# Altium PCB PCB1.PcbDoc (part 2 of 2)
Units mm, origin at the board's own origin, x right, y up, seen from the top; angles counter-clockwise.
Board outline 102 x 101.22 mm, 2 copper layers (Top Layer, Bottom Layer); 182 components, 6 nets, 441 pads, 0 vias.
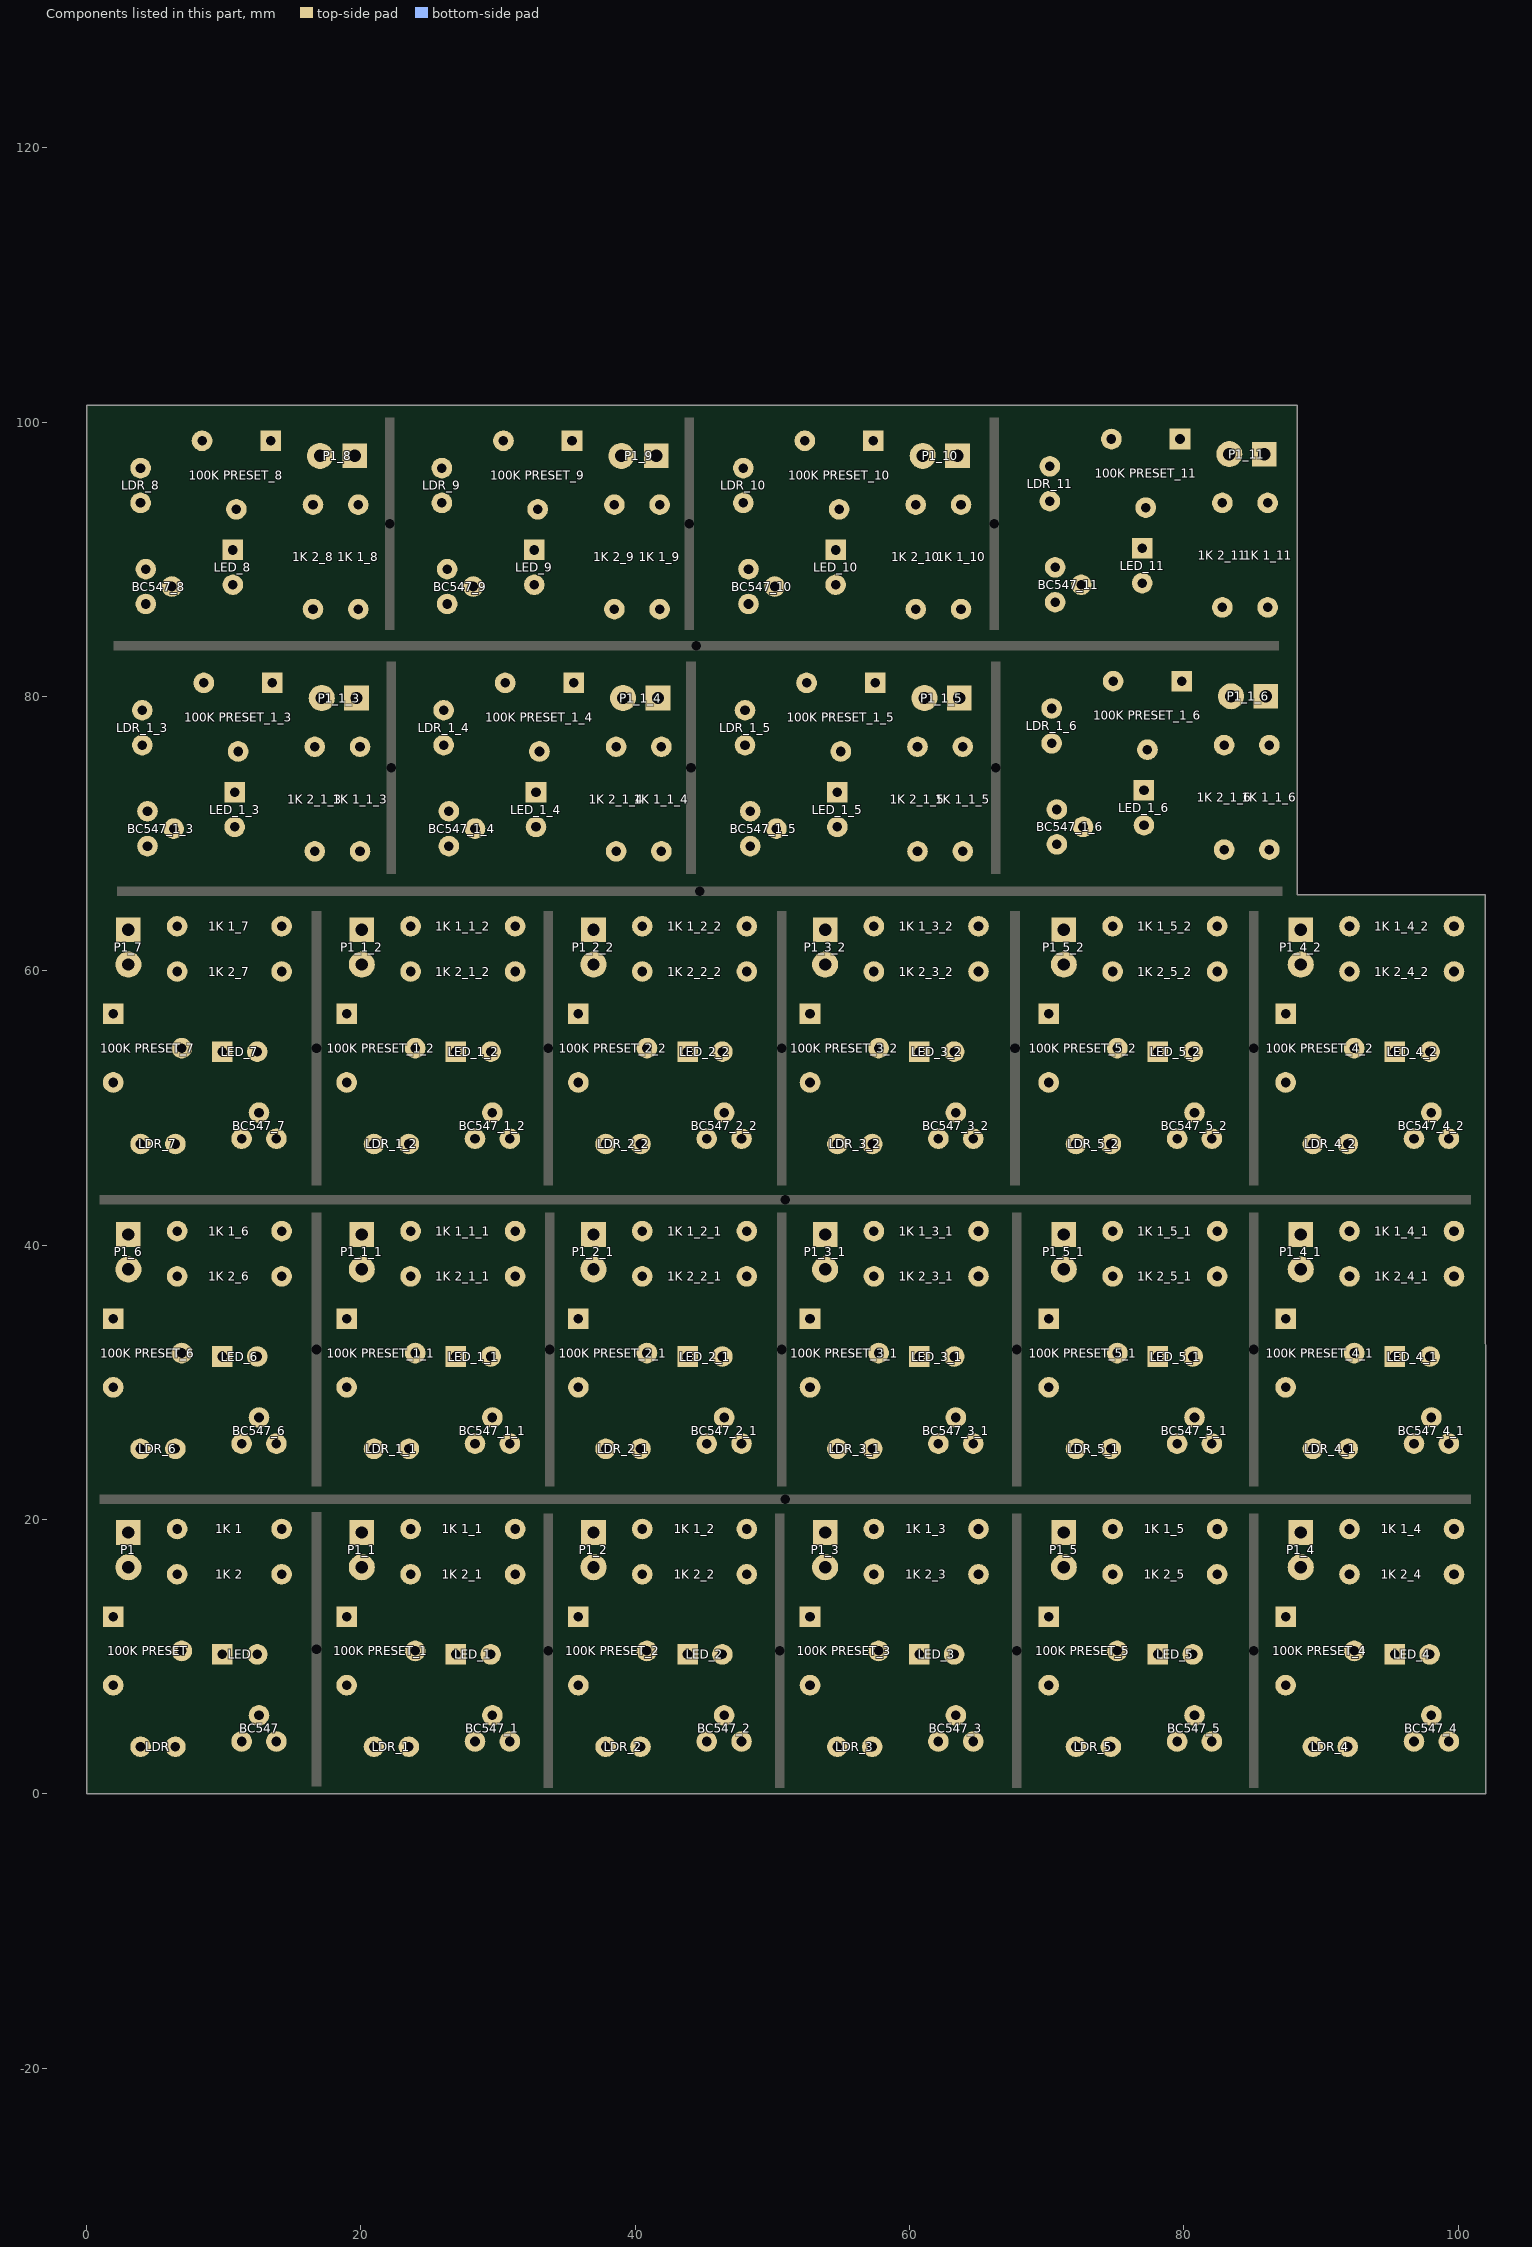
[diagram p2: the components of this part, seen from the top]

## Nets (pads, with @x,y where several pads share a name; then routed paths per layer and width w, separated by ;. In a path a pad name is that pad's centre, name@x,y a point inside that pad or via, vN(x,y) a via of type N, cw(c..) or ccw(c..) an arc to the next point about the centre after c; other vN are vias at no path point) (continued)
copper on no net: | length 1969
  Top Layer w0.508: 3.048,38.227 4.572,36.703 4.572,27.051 6.477,25.146 ; 3.048,60.452 4.572,58.928 4.572,49.276 6.477,47.371 ; 3.937,94.107 5.842,96.012 15.494,96.012 17.018,97.536 ; 4.064,76.454 5.969,78.359 15.621,78.359 17.145,79.883 ; 6.223,88.011 7.747,89.535 7.747,90.464 10.922,93.639 ; 6.35,70.358 7.874,71.882 7.874,72.811 11.049,75.986 ; 6.945,32.131 10.12,28.956 11.049,28.956 12.573,27.432 ; 6.945,54.356 10.12,51.181 11.049,51.181 12.573,49.657 ; 20.066,16.51 21.59,14.986 21.59,5.334 23.495,3.429 ; 20.066,38.227 21.59,36.703 21.59,27.051 23.495,25.146 ; 20.066,60.452 21.59,58.928 21.59,49.276 23.495,47.371 ; 23.963,10.414 27.138,7.239 28.067,7.239 29.591,5.715 ; 23.963,32.131 27.138,28.956 28.067,28.956 29.591,27.432 ; 23.963,54.356 27.138,51.181 28.067,51.181 29.591,49.657 ; 25.908,94.107 27.813,96.012 37.465,96.012 38.989,97.536 ; 26.035,76.454 27.94,78.359 37.592,78.359 39.116,79.883 ; 28.194,88.011 29.718,89.535 29.718,90.464 32.893,93.639 ; 28.321,70.358 29.845,71.882 29.845,72.811 33.02,75.986 ; 36.957,16.51 38.481,14.986 38.481,5.334 40.386,3.429 ; 36.957,38.227 38.481,36.703 38.481,27.051 40.386,25.146 ; 36.957,60.452 38.481,58.928 38.481,49.276 40.386,47.371 ; 40.854,10.414 44.029,7.239 44.958,7.239 46.482,5.715 ; 40.854,32.131 44.029,28.956 44.958,28.956 46.482,27.432 ; 40.854,54.356 44.029,51.181 44.958,51.181 46.482,49.657 ; 47.879,94.107 49.784,96.012 59.436,96.012 60.96,97.536 ; 48.006,76.454 49.911,78.359 59.563,78.359 61.087,79.883 ; 50.165,88.011 51.689,89.535 51.689,90.464 54.864,93.639 ; 50.292,70.358 51.816,71.882 51.816,72.811 54.991,75.986 ; 53.848,16.51 55.372,14.986 55.372,5.334 57.277,3.429 ; 53.848,38.227 55.372,36.703 55.372,27.051 57.277,25.146 ; 53.848,60.452 55.372,58.928 55.372,49.276 57.277,47.371 ; 57.745,10.414 60.92,7.239 61.849,7.239 63.373,5.715 ; 57.745,32.131 60.92,28.956 61.849,28.956 63.373,27.432 ; 57.745,54.356 60.92,51.181 61.849,51.181 63.373,49.657 ; 70.231,94.234 72.136,96.139 81.788,96.139 83.312,97.663 ; 70.358,76.581 72.263,78.486 81.915,78.486 83.439,80.01 ; 71.247,16.51 72.771,14.986 72.771,5.334 74.676,3.429 ; 71.247,38.227 72.771,36.703 72.771,27.051 74.676,25.146 ; 71.247,60.452 72.771,58.928 72.771,49.276 74.676,47.371 ; 72.517,88.138 74.041,89.662 74.041,90.591 77.216,93.766 ; 72.644,70.485 74.168,72.009 74.168,72.938 77.343,76.113 ; 75.144,10.414 78.319,7.239 79.248,7.239 80.772,5.715 ; 75.144,32.131 78.319,28.956 79.248,28.956 80.772,27.432 ; 75.144,54.356 78.319,51.181 79.248,51.181 80.772,49.657 ; 88.519,16.51 90.043,14.986 90.043,5.334 91.948,3.429 ; 88.519,38.227 90.043,36.703 90.043,27.051 91.948,25.146 ; 88.519,60.452 90.043,58.928 90.043,49.276 91.948,47.371 ; 92.416,10.414 95.591,7.239 96.52,7.239 98.044,5.715 ; 92.416,32.131 95.591,28.956 96.52,28.956 98.044,27.432 ; 92.416,54.356 95.591,51.181 96.52,51.181 98.044,49.657
  Bottom Layer w0.508: 1.945,34.631 7.834,34.631 14.224,41.021 ; 1.945,56.856 7.834,56.856 14.224,63.246 ; 3.048,40.767 6.35,40.767 6.604,41.021 6.604,37.719 ; 3.048,62.992 6.35,62.992 6.604,63.246 6.604,59.944 ; 3.937,25.146 1.945,27.138 1.945,29.631 4.445,29.631 6.945,32.131 ; 3.937,47.371 1.945,49.363 1.945,51.856 4.445,51.856 6.945,54.356 ; 3.937,94.107 2.794,92.964 2.794,88.265 4.318,86.741 ; 3.937,96.647 5.929,98.639 8.422,98.639 8.422,96.139 10.922,93.639 ; 4.064,76.454 2.921,75.311 2.921,70.612 4.445,69.088 ; 4.064,78.994 6.056,80.986 8.549,80.986 8.549,78.486 11.049,75.986 ; 4.318,89.281 4.953,89.916 8.89,89.916 10.668,88.138 ; 4.445,71.628 5.08,72.263 9.017,72.263 10.795,70.485 ; 6.477,25.146 7.62,24.003 12.319,24.003 13.843,25.527 ; 6.477,47.371 7.62,46.228 12.319,46.228 13.843,47.752 ; 9.906,31.877 9.906,33.401 14.224,37.719 ; 9.906,54.102 9.906,55.626 14.224,59.944 ; 10.668,90.678 12.192,90.678 16.51,86.36 ; 10.795,73.025 12.319,73.025 16.637,68.707 ; 11.303,25.527 10.668,26.162 10.668,30.099 12.446,31.877 ; 11.303,47.752 10.668,48.387 10.668,52.324 12.446,54.102 ; 13.422,98.639 13.422,92.75 19.812,86.36 ; 13.549,80.986 13.549,75.097 19.939,68.707 ; 16.51,93.98 19.812,93.98 19.558,94.234 19.558,97.536 ; 16.637,76.327 19.939,76.327 19.685,76.581 19.685,79.883 ; 18.963,12.914 24.852,12.914 31.242,19.304 ; 18.963,34.631 24.852,34.631 31.242,41.021 ; 18.963,56.856 24.852,56.856 31.242,63.246 ; 20.066,19.05 23.368,19.05 23.622,19.304 23.622,16.002 ; 20.066,40.767 23.368,40.767 23.622,41.021 23.622,37.719 ; 20.066,62.992 23.368,62.992 23.622,63.246 23.622,59.944 ; 20.955,3.429 18.963,5.421 18.963,7.914 21.463,7.914 23.963,10.414 ; 20.955,25.146 18.963,27.138 18.963,29.631 21.463,29.631 23.963,32.131 ; 20.955,47.371 18.963,49.363 18.963,51.856 21.463,51.856 23.963,54.356 ; 23.495,3.429 24.638,2.286 29.337,2.286 30.861,3.81 ; 23.495,25.146 24.638,24.003 29.337,24.003 30.861,25.527 ; 23.495,47.371 24.638,46.228 29.337,46.228 30.861,47.752 ; 25.908,94.107 24.765,92.964 24.765,88.265 26.289,86.741 ; 25.908,96.647 27.9,98.639 30.393,98.639 30.393,96.139 32.893,93.639 ; 26.035,76.454 24.892,75.311 24.892,70.612 26.416,69.088 ; 26.035,78.994 28.027,80.986 30.52,80.986 30.52,78.486 33.02,75.986 ; 26.289,89.281 26.924,89.916 30.861,89.916 32.639,88.138 ; 26.416,71.628 27.051,72.263 30.988,72.263 32.766,70.485 ; 26.924,10.16 26.924,11.684 31.242,16.002 ; 26.924,31.877 26.924,33.401 31.242,37.719 ; 26.924,54.102 26.924,55.626 31.242,59.944 ; 28.321,3.81 27.686,4.445 27.686,8.382 29.464,10.16 ; 28.321,25.527 27.686,26.162 27.686,30.099 29.464,31.877 ; 28.321,47.752 27.686,48.387 27.686,52.324 29.464,54.102 ; 32.639,90.678 34.163,90.678 38.481,86.36 ; 32.766,73.025 34.29,73.025 38.608,68.707 ; 35.393,98.639 35.393,92.75 41.783,86.36 ; 35.52,80.986 35.52,75.097 41.91,68.707 ; 35.854,12.914 41.743,12.914 48.133,19.304 ; 35.854,34.631 41.743,34.631 48.133,41.021 ; 35.854,56.856 41.743,56.856 48.133,63.246 ; 36.957,19.05 40.259,19.05 40.513,19.304 40.513,16.002 ; 36.957,40.767 40.259,40.767 40.513,41.021 40.513,37.719 ; 36.957,62.992 40.259,62.992 40.513,63.246 40.513,59.944 ; 37.846,3.429 35.854,5.421 35.854,7.914 38.354,7.914 40.854,10.414 ; 37.846,25.146 35.854,27.138 35.854,29.631 38.354,29.631 40.854,32.131 ; 37.846,47.371 35.854,49.363 35.854,51.856 38.354,51.856 40.854,54.356 ; 38.481,93.98 41.783,93.98 41.529,94.234 41.529,97.536 ; 38.608,76.327 41.91,76.327 41.656,76.581 41.656,79.883 ; 40.386,3.429 41.529,2.286 46.228,2.286 47.752,3.81 ; 40.386,25.146 41.529,24.003 46.228,24.003 47.752,25.527 ; 40.386,47.371 41.529,46.228 46.228,46.228 47.752,47.752 ; 43.815,10.16 43.815,11.684 48.133,16.002 ; 43.815,31.877 43.815,33.401 48.133,37.719 ; 43.815,54.102 43.815,55.626 48.133,59.944 ; 45.212,3.81 44.577,4.445 44.577,8.382 46.355,10.16 ; 45.212,25.527 44.577,26.162 44.577,30.099 46.355,31.877 ; 45.212,47.752 44.577,48.387 44.577,52.324 46.355,54.102 ; 47.879,94.107 46.736,92.964 46.736,88.265 48.26,86.741 ; 47.879,96.647 49.871,98.639 52.364,98.639 52.364,96.139 54.864,93.639 ; 48.006,76.454 46.863,75.311 46.863,70.612 48.387,69.088 ; 48.006,78.994 49.998,80.986 52.491,80.986 52.491,78.486 54.991,75.986 ; 48.26,89.281 48.895,89.916 52.832,89.916 54.61,88.138 ; 48.387,71.628 49.022,72.263 52.959,72.263 54.737,70.485 ; 52.745,12.914 58.634,12.914 65.024,19.304 ; 52.745,34.631 58.634,34.631 65.024,41.021 ; 52.745,56.856 58.634,56.856 65.024,63.246 ; 53.848,19.05 57.15,19.05 57.404,19.304 57.404,16.002 ; 53.848,40.767 57.15,40.767 57.404,41.021 57.404,37.719 ; 53.848,62.992 57.15,62.992 57.404,63.246 57.404,59.944 ; 54.61,90.678 56.134,90.678 60.452,86.36 ; 54.737,3.429 52.745,5.421 52.745,7.914 55.245,7.914 57.745,10.414 ; 54.737,25.146 52.745,27.138 52.745,29.631 55.245,29.631 57.745,32.131 ; 54.737,47.371 52.745,49.363 52.745,51.856 55.245,51.856 57.745,54.356 ; 54.737,73.025 56.261,73.025 60.579,68.707 ; 57.277,3.429 58.42,2.286 63.119,2.286 64.643,3.81 ; 57.277,25.146 58.42,24.003 63.119,24.003 64.643,25.527 ; 57.277,47.371 58.42,46.228 63.119,46.228 64.643,47.752 ; 57.364,98.639 57.364,92.75 63.754,86.36 ; 57.491,80.986 57.491,75.097 63.881,68.707 ; 60.452,93.98 63.754,93.98 63.5,94.234 63.5,97.536 ; 60.579,76.327 63.881,76.327 63.627,76.581 63.627,79.883 ; 60.706,10.16 60.706,11.684 65.024,16.002 ; 60.706,31.877 60.706,33.401 65.024,37.719 ; 60.706,54.102 60.706,55.626 65.024,59.944 ; 62.103,3.81 61.468,4.445 61.468,8.382 63.246,10.16 ; 62.103,25.527 61.468,26.162 61.468,30.099 63.246,31.877 ; 62.103,47.752 61.468,48.387 61.468,52.324 63.246,54.102 ; 70.144,12.914 76.033,12.914 82.423,19.304 ; 70.144,34.631 76.033,34.631 82.423,41.021 ; 70.144,56.856 76.033,56.856 82.423,63.246 ; 70.231,94.234 69.088,93.091 69.088,88.392 70.612,86.868 ; 70.231,96.774 72.223,98.766 74.716,98.766 74.716,96.266 77.216,93.766 ; 70.358,76.581 69.215,75.438 69.215,70.739 70.739,69.215 ; 70.358,79.121 72.35,81.113 74.843,81.113 74.843,78.613 77.343,76.113 ; 70.612,89.408 71.247,90.043 75.184,90.043 76.962,88.265 ; 70.739,71.755 71.374,72.39 75.311,72.39 77.089,70.612 ; 71.247,19.05 74.549,19.05 74.803,19.304 74.803,16.002 ; 71.247,40.767 74.549,40.767 74.803,41.021 74.803,37.719 ; 71.247,62.992 74.549,62.992 74.803,63.246 74.803,59.944 ; 72.136,3.429 70.144,5.421 70.144,7.914 72.644,7.914 75.144,10.414 ; 72.136,25.146 70.144,27.138 70.144,29.631 72.644,29.631 75.144,32.131 ; 72.136,47.371 70.144,49.363 70.144,51.856 72.644,51.856 75.144,54.356 ; 74.676,3.429 75.819,2.286 80.518,2.286 82.042,3.81 ; 74.676,25.146 75.819,24.003 80.518,24.003 82.042,25.527 ; 74.676,47.371 75.819,46.228 80.518,46.228 82.042,47.752 ; 76.962,90.805 78.486,90.805 82.804,86.487 ; 77.089,73.152 78.613,73.152 82.931,68.834 ; 78.105,10.16 78.105,11.684 82.423,16.002 ; 78.105,31.877 78.105,33.401 82.423,37.719 ; 78.105,54.102 78.105,55.626 82.423,59.944 ; 79.502,3.81 78.867,4.445 78.867,8.382 80.645,10.16 ; 79.502,25.527 78.867,26.162 78.867,30.099 80.645,31.877 ; 79.502,47.752 78.867,48.387 78.867,52.324 80.645,54.102 ; 79.716,98.766 79.716,92.877 86.106,86.487 ; 79.843,81.113 79.843,75.224 86.233,68.834 ; 82.804,94.107 86.106,94.107 85.852,94.361 85.852,97.663 ; 82.931,76.454 86.233,76.454 85.979,76.708 85.979,80.01 ; 87.416,12.914 93.305,12.914 99.695,19.304 ; 87.416,34.631 93.305,34.631 99.695,41.021 ; 87.416,56.856 93.305,56.856 99.695,63.246 ; 88.519,19.05 91.821,19.05 92.075,19.304 92.075,16.002 ; 88.519,40.767 91.821,40.767 92.075,41.021 92.075,37.719 ; 88.519,62.992 91.821,62.992 92.075,63.246 92.075,59.944 ; 89.408,3.429 87.416,5.421 87.416,7.914 89.916,7.914 92.416,10.414 ; 89.408,25.146 87.416,27.138 87.416,29.631 89.916,29.631 92.416,32.131 ; 89.408,47.371 87.416,49.363 87.416,51.856 89.916,51.856 92.416,54.356 ; 91.948,3.429 93.091,2.286 97.79,2.286 99.314,3.81 ; 91.948,25.146 93.091,24.003 97.79,24.003 99.314,25.527 ; 91.948,47.371 93.091,46.228 97.79,46.228 99.314,47.752 ; 95.377,10.16 95.377,11.684 99.695,16.002 ; 95.377,31.877 95.377,33.401 99.695,37.719 ; 95.377,54.102 95.377,55.626 99.695,59.944 ; 96.774,3.81 96.139,4.445 96.139,8.382 97.917,10.16 ; 96.774,25.527 96.139,26.162 96.139,30.099 97.917,31.877 ; 96.774,47.752 96.139,48.387 96.139,52.324 97.917,54.102

## Keep-outs
Keep-Out Layer:
  lines w0.254: 102.108,-0.254 101.746,-0.254 -0.127,-0.254 -0.127,101.346 88.519,101.346 88.519,65.913 101.6,65.913 102.108,65.913

## Silkscreen, mask and mechanical layers (free items; w line width, h text height)
Top Overlay:
  drawing of 416 lines, arcs and shapes, not listed
  text "-" at 82.55,100.076 h1.3 r270
  text "+" at 85.09,100.076 h1.52 r270
  text "-" at 16.256,99.949 h1.3 r270
  text "+" at 18.796,99.949 h1.52 r270
  text "-" at 38.227,99.949 h1.3 r270
  text "+" at 40.767,99.949 h1.52 r270
  text "-" at 60.198,99.949 h1.3 r270
  text "+" at 62.738,99.949 h1.52 r270
  text "PRESET" at 75.819,99.314 h0.8 r270
  text "PRESET" at 9.525,99.187 h0.8 r270
  text "PRESET" at 31.496,99.187 h0.8 r270
  text "PRESET" at 53.467,99.187 h0.8 r270
  text "100K" at 77.47,99.06 h1.2 r270
  text "100K" at 11.176,98.933 h1.2 r270
  text "100K" at 33.147,98.933 h1.2 r270
  text "100K" at 55.118,98.933 h1.2 r270
  text "LDR" at 68.199,98.552 h1.3
  text "LDR" at 1.905,98.425 h1.3
  text "LDR" at 23.876,98.425 h1.3
  text "LDR" at 45.847,98.425 h1.3
  text "9V" at 85.471,96.012 h1.2 r180
  text "9V" at 19.177,95.885 h1.2 r180
  text "9V" at 41.148,95.885 h1.2 r180
  text "9V" at 63.119,95.885 h1.2 r180
  text "LED" at 79.883,91.694 h1.3 r270
  text "LED" at 13.589,91.567 h1.3 r270
  text "LED" at 35.56,91.567 h1.3 r270
  text "LED" at 57.531,91.567 h1.3 r270
  text "+" at 77.724,91.186 h1.52 r270
  text "1K" at 82.296,91.186 h1 r270
  text "1K" at 85.598,91.186 h1 r270
  text "+" at 11.43,91.059 h1.52 r270
  text "1K" at 16.002,91.059 h1 r270
  text "1K" at 19.304,91.059 h1 r270
  text "+" at 33.401,91.059 h1.52 r270
  text "1K" at 37.973,91.059 h1 r270
  text "1K" at 41.275,91.059 h1 r270
  text "+" at 55.372,91.059 h1.52 r270
  text "1K" at 59.944,91.059 h1 r270
  text "1K" at 63.246,91.059 h1 r270
  text "BC547" at 67.564,90.551 h1.1 r270
  text "BC547" at 1.27,90.424 h1.1 r270
  text "BC547" at 23.241,90.424 h1.1 r270
  text "BC547" at 45.212,90.424 h1.1 r270
  text "-" at 77.47,88.646 h1.3 r270
  text "-" at 11.176,88.519 h1.3 r270
  text "-" at 33.147,88.519 h1.3 r270
  text "-" at 55.118,88.519 h1.3 r270
  text "A.I. PCB" at 72.136,85.09 h0.9
  text "A.I. PCB" at 5.842,84.963 h0.9
  text "A.I. PCB" at 27.813,84.963 h0.9
  text "A.I. PCB" at 49.784,84.963 h0.9
  text "-" at 82.677,82.423 h1.3 r270
  text "+" at 85.217,82.423 h1.52 r270
  text "-" at 16.383,82.296 h1.3 r270
  text "+" at 18.923,82.296 h1.52 r270
  text "-" at 38.354,82.296 h1.3 r270
  text "+" at 40.894,82.296 h1.52 r270
  text "-" at 60.325,82.296 h1.3 r270
  text "+" at 62.865,82.296 h1.52 r270
  text "PRESET" at 75.946,81.661 h0.8 r270
  text "PRESET" at 9.652,81.534 h0.8 r270
  text "PRESET" at 31.623,81.534 h0.8 r270
  text "PRESET" at 53.594,81.534 h0.8 r270
  text "100K" at 77.597,81.407 h1.2 r270
  text "100K" at 11.303,81.28 h1.2 r270
  text "100K" at 33.274,81.28 h1.2 r270
  text "100K" at 55.245,81.28 h1.2 r270
  text "LDR" at 68.326,80.899 h1.3
  text "LDR" at 2.032,80.772 h1.3
  text "LDR" at 24.003,80.772 h1.3
  text "LDR" at 45.974,80.772 h1.3
  text "9V" at 85.598,78.359 h1.2 r180
  text "9V" at 19.304,78.232 h1.2 r180
  text "9V" at 41.275,78.232 h1.2 r180
  text "9V" at 63.246,78.232 h1.2 r180
  text "LED" at 80.01,74.041 h1.3 r270
  text "LED" at 13.716,73.914 h1.3 r270
  text "LED" at 35.687,73.914 h1.3 r270
  text "LED" at 57.658,73.914 h1.3 r270
  text "+" at 77.851,73.533 h1.52 r270
  text "1K" at 82.423,73.533 h1 r270
  text "1K" at 85.725,73.533 h1 r270
  text "+" at 11.557,73.406 h1.52 r270
  text "1K" at 16.129,73.406 h1 r270
  text "1K" at 19.431,73.406 h1 r270
  text "+" at 33.528,73.406 h1.52 r270
  text "1K" at 38.1,73.406 h1 r270
  text "1K" at 41.402,73.406 h1 r270
  text "+" at 55.499,73.406 h1.52 r270
  text "1K" at 60.071,73.406 h1 r270
  text "1K" at 63.373,73.406 h1 r270
  text "BC547" at 67.691,72.898 h1.1 r270
  text "BC547" at 1.397,72.771 h1.1 r270
  text "BC547" at 23.368,72.771 h1.1 r270
  text "BC547" at 45.339,72.771 h1.1 r270
  text "-" at 77.597,70.993 h1.3 r270
  text "-" at 11.303,70.866 h1.3 r270
  text "-" at 33.274,70.866 h1.3 r270
  text "-" at 55.245,70.866 h1.3 r270
  text "A.I. PCB" at 72.263,67.437 h0.9
  text "A.I. PCB" at 5.969,67.31 h0.9
  text "A.I. PCB" at 27.94,67.31 h0.9
  text "A.I. PCB" at 49.911,67.31 h0.9
  text "1K" at 9.525,62.738 h1
  text "1K" at 26.543,62.738 h1
  text "1K" at 43.434,62.738 h1
  text "1K" at 60.325,62.738 h1
  text "1K" at 77.724,62.738 h1
  text "1K" at 94.996,62.738 h1
  text "9V" at 4.699,62.611 h1.2 r270
  text "9V" at 21.717,62.611 h1.2 r270
  text "9V" at 38.608,62.611 h1.2 r270
  text "9V" at 55.499,62.611 h1.2 r270
  text "9V" at 72.898,62.611 h1.2 r270
  text "9V" at 90.17,62.611 h1.2 r270
  text "+" at 0.635,62.23 h1.52
  text "+" at 17.653,62.23 h1.52
  text "+" at 34.544,62.23 h1.52
  text "+" at 51.435,62.23 h1.52
  text "+" at 68.834,62.23 h1.52
  text "+" at 86.106,62.23 h1.52
  text "-" at 0.635,59.69 h1.3
  text "-" at 17.653,59.69 h1.3
  text "-" at 34.544,59.69 h1.3
  text "-" at 51.435,59.69 h1.3
  text "-" at 68.834,59.69 h1.3
  text "-" at 86.106,59.69 h1.3
  text "1K" at 9.525,59.436 h1
  text "1K" at 26.543,59.436 h1
  text "1K" at 43.434,59.436 h1
  text "1K" at 60.325,59.436 h1
  text "1K" at 77.724,59.436 h1
  text "1K" at 94.996,59.436 h1
  text "LED" at 9.017,57.023 h1.3
  text "LED" at 26.035,57.023 h1.3
  text "LED" at 42.926,57.023 h1.3
  text "LED" at 59.817,57.023 h1.3
  text "LED" at 77.216,57.023 h1.3
  text "LED" at 94.488,57.023 h1.3
  text "+" at 9.525,54.864 h1.52
  text "+" at 26.543,54.864 h1.52
  text "+" at 43.434,54.864 h1.52
  text "+" at 60.325,54.864 h1.52
  text "+" at 77.724,54.864 h1.52
  text "+" at 94.996,54.864 h1.52
  text "100K" at 1.651,54.61 h1.2
  text "-" at 12.065,54.61 h1.3
  text "100K" at 18.669,54.61 h1.2
  text "-" at 29.083,54.61 h1.3
  text "100K" at 35.56,54.61 h1.2
  text "-" at 45.974,54.61 h1.3
  text "100K" at 52.451,54.61 h1.2
  text "-" at 62.865,54.61 h1.3
  text "100K" at 69.85,54.61 h1.2
  text "-" at 80.264,54.61 h1.3
  text "100K" at 87.122,54.61 h1.2
  text "-" at 97.536,54.61 h1.3
  text "PRESET" at 1.397,52.959 h0.8
  text "PRESET" at 18.415,52.959 h0.8
  text "PRESET" at 35.306,52.959 h0.8
  text "PRESET" at 52.197,52.959 h0.8
  text "PRESET" at 69.596,52.959 h0.8
  text "PRESET" at 86.868,52.959 h0.8
  text "A.I. PCB" at 15.621,49.276 h0.9 r90
  text "A.I. PCB" at 32.639,49.276 h0.9 r90
  text "A.I. PCB" at 49.53,49.276 h0.9 r90
  text "A.I. PCB" at 66.421,49.276 h0.9 r90
  text "A.I. PCB" at 83.82,49.276 h0.9 r90
  text "A.I. PCB" at 101.092,49.276 h0.9 r90
  text "LDR" at 2.159,45.339 h1.3 r90
  text "LDR" at 19.177,45.339 h1.3 r90
  text "LDR" at 36.068,45.339 h1.3 r90
  text "LDR" at 52.959,45.339 h1.3 r90
  text "LDR" at 70.358,45.339 h1.3 r90
  text "LDR" at 87.63,45.339 h1.3 r90
  text "BC547" at 10.16,44.704 h1.1
  text "BC547" at 27.178,44.704 h1.1
  text "BC547" at 44.069,44.704 h1.1
  text "BC547" at 60.96,44.704 h1.1
  text "BC547" at 78.359,44.704 h1.1
  text "BC547" at 95.631,44.704 h1.1
  text "1K" at 9.525,40.513 h1
  text "1K" at 26.543,40.513 h1
  text "1K" at 43.434,40.513 h1
  text "1K" at 60.325,40.513 h1
  text "1K" at 77.724,40.513 h1
  text "1K" at 94.996,40.513 h1
  text "9V" at 4.699,40.386 h1.2 r270
  text "9V" at 21.717,40.386 h1.2 r270
  text "9V" at 38.608,40.386 h1.2 r270
  text "9V" at 55.499,40.386 h1.2 r270
  text "9V" at 72.898,40.386 h1.2 r270
  text "9V" at 90.17,40.386 h1.2 r270
  text "+" at 0.635,40.005 h1.52
  text "+" at 17.653,40.005 h1.52
  text "+" at 34.544,40.005 h1.52
  text "+" at 51.435,40.005 h1.52
  text "+" at 68.834,40.005 h1.52
  text "+" at 86.106,40.005 h1.52
  text "-" at 0.635,37.465 h1.3
  text "-" at 17.653,37.465 h1.3
  text "-" at 34.544,37.465 h1.3
  text "-" at 51.435,37.465 h1.3
  text "-" at 68.834,37.465 h1.3
  text "-" at 86.106,37.465 h1.3
  text "1K" at 9.525,37.211 h1
  text "1K" at 26.543,37.211 h1
  text "1K" at 43.434,37.211 h1
  text "1K" at 60.325,37.211 h1
  text "1K" at 77.724,37.211 h1
  text "1K" at 94.996,37.211 h1
  text "LED" at 9.017,34.798 h1.3
  text "LED" at 26.035,34.798 h1.3
  text "LED" at 42.926,34.798 h1.3
  text "LED" at 59.817,34.798 h1.3
  text "LED" at 77.216,34.798 h1.3
  text "LED" at 94.488,34.798 h1.3
  text "+" at 9.525,32.639 h1.52
  text "+" at 26.543,32.639 h1.52
  text "+" at 43.434,32.639 h1.52
  text "+" at 60.325,32.639 h1.52
  text "+" at 77.724,32.639 h1.52
  text "+" at 94.996,32.639 h1.52
  text "100K" at 1.651,32.385 h1.2
  text "-" at 12.065,32.385 h1.3
  text "100K" at 18.669,32.385 h1.2
  text "-" at 29.083,32.385 h1.3
  text "100K" at 35.56,32.385 h1.2
  text "-" at 45.974,32.385 h1.3
  text "100K" at 52.451,32.385 h1.2
  text "-" at 62.865,32.385 h1.3
  text "100K" at 69.85,32.385 h1.2
  text "-" at 80.264,32.385 h1.3
  text "100K" at 87.122,32.385 h1.2
  text "-" at 97.536,32.385 h1.3
  text "PRESET" at 1.397,30.734 h0.8
  text "PRESET" at 18.415,30.734 h0.8
  text "PRESET" at 35.306,30.734 h0.8
  text "PRESET" at 52.197,30.734 h0.8
  text "PRESET" at 69.596,30.734 h0.8
  text "PRESET" at 86.868,30.734 h0.8
  text "A.I. PCB" at 15.621,27.051 h0.9 r90
  text "A.I. PCB" at 32.639,27.051 h0.9 r90
  text "A.I. PCB" at 49.53,27.051 h0.9 r90
  text "A.I. PCB" at 66.421,27.051 h0.9 r90
  text "A.I. PCB" at 83.82,27.051 h0.9 r90
  text "A.I. PCB" at 101.092,27.051 h0.9 r90
  text "LDR" at 2.159,23.114 h1.3 r90
  text "LDR" at 19.177,23.114 h1.3 r90
  text "LDR" at 36.068,23.114 h1.3 r90
  text "LDR" at 52.959,23.114 h1.3 r90
  text "LDR" at 70.358,23.114 h1.3 r90
  text "LDR" at 87.63,23.114 h1.3 r90
  text "BC547" at 10.16,22.479 h1.1
  text "BC547" at 27.178,22.479 h1.1
  text "BC547" at 44.069,22.479 h1.1
  text "BC547" at 60.96,22.479 h1.1
  text "BC547" at 78.359,22.479 h1.1
  text "BC547" at 95.631,22.479 h1.1
  text "1K" at 9.525,18.796 h1
  text "1K" at 26.543,18.796 h1
  text "1K" at 43.434,18.796 h1
  text "1K" at 60.325,18.796 h1
  text "1K" at 77.724,18.796 h1
  text "1K" at 94.996,18.796 h1
  text "9V" at 4.699,18.669 h1.2 r270
  text "9V" at 21.717,18.669 h1.2 r270
  text "9V" at 38.608,18.669 h1.2 r270
  text "9V" at 55.499,18.669 h1.2 r270
  text "9V" at 72.898,18.669 h1.2 r270
  text "9V" at 90.17,18.669 h1.2 r270
  text "+" at 0.635,18.288 h1.52
  text "+" at 17.653,18.288 h1.52
  text "+" at 34.544,18.288 h1.52
  text "+" at 51.435,18.288 h1.52
  text "+" at 68.834,18.288 h1.52
  text "+" at 86.106,18.288 h1.52
  text "-" at 0.635,15.748 h1.3
  text "-" at 17.653,15.748 h1.3
  text "-" at 34.544,15.748 h1.3
  text "-" at 51.435,15.748 h1.3
  text "-" at 68.834,15.748 h1.3
  text "-" at 86.106,15.748 h1.3
  text "1K" at 9.525,15.494 h1
  text "1K" at 26.543,15.494 h1
  text "1K" at 43.434,15.494 h1
  text "1K" at 60.325,15.494 h1
  text "1K" at 77.724,15.494 h1
  text "1K" at 94.996,15.494 h1
  text "LED" at 9.017,13.081 h1.3
  text "LED" at 26.035,13.081 h1.3
  text "LED" at 42.926,13.081 h1.3
  text "LED" at 59.817,13.081 h1.3
  text "LED" at 77.216,13.081 h1.3
  text "LED" at 94.488,13.081 h1.3
  text "+" at 9.525,10.922 h1.52
  text "+" at 26.543,10.922 h1.52
  text "+" at 43.434,10.922 h1.52
  text "+" at 60.325,10.922 h1.52
  text "+" at 77.724,10.922 h1.52
  text "+" at 94.996,10.922 h1.52
  text "100K" at 1.651,10.668 h1.2
  text "-" at 12.065,10.668 h1.3
  text "100K" at 18.669,10.668 h1.2
  text "-" at 29.083,10.668 h1.3
  text "100K" at 35.56,10.668 h1.2
  text "-" at 45.974,10.668 h1.3
  text "100K" at 52.451,10.668 h1.2
  text "-" at 62.865,10.668 h1.3
  text "100K" at 69.85,10.668 h1.2
  text "-" at 80.264,10.668 h1.3
  text "100K" at 87.122,10.668 h1.2
  text "-" at 97.536,10.668 h1.3
  text "PRESET" at 1.397,9.017 h0.8
  text "PRESET" at 18.415,9.017 h0.8
  text "PRESET" at 35.306,9.017 h0.8
  text "PRESET" at 52.197,9.017 h0.8
  text "PRESET" at 69.596,9.017 h0.8
  text "PRESET" at 86.868,9.017 h0.8
  text "A.I. PCB" at 15.621,5.334 h0.9 r90
  text "A.I. PCB" at 32.639,5.334 h0.9 r90
  text "A.I. PCB" at 49.53,5.334 h0.9 r90
  text "A.I. PCB" at 66.421,5.334 h0.9 r90
  text "A.I. PCB" at 83.82,5.334 h0.9 r90
  text "A.I. PCB" at 101.092,5.334 h0.9 r90
  text "LDR" at 2.159,1.397 h1.3 r90
  text "LDR" at 19.177,1.397 h1.3 r90
  text "LDR" at 36.068,1.397 h1.3 r90
  text "LDR" at 52.959,1.397 h1.3 r90
  text "LDR" at 70.358,1.397 h1.3 r90
  text "LDR" at 87.63,1.397 h1.3 r90
  text "BC547" at 10.16,0.762 h1.1
  text "BC547" at 27.178,0.762 h1.1
  text "BC547" at 44.069,0.762 h1.1
  text "BC547" at 60.96,0.762 h1.1
  text "BC547" at 78.359,0.762 h1.1
  text "BC547" at 95.631,0.762 h1.1
Bottom Overlay:
  text "A.I. PCB" at 81.788,85.217 h1.4
  text "A.I. PCB" at 15.494,85.09 h1.4
  text "A.I. PCB" at 37.465,85.09 h1.4
  text "A.I. PCB" at 59.436,85.09 h1.4
  text "DARK SENSITIVE" at 67.691,85.09 h1.1 r270
  text "DARK SENSITIVE" at 1.397,84.963 h1.1 r270
  text "DARK SENSITIVE" at 23.368,84.963 h1.1 r270
  text "DARK SENSITIVE" at 45.339,84.963 h1.1 r270
  text "A.I. PCB" at 81.915,67.564 h1.4
  text "A.I. PCB" at 15.621,67.437 h1.4
  text "A.I. PCB" at 37.592,67.437 h1.4
  text "A.I. PCB" at 59.563,67.437 h1.4
  text "DARK SENSITIVE" at 67.818,67.437 h1.1 r270
  text "DARK SENSITIVE" at 1.524,67.31 h1.1 r270
  text "DARK SENSITIVE" at 23.495,67.31 h1.1 r270
  text "DARK SENSITIVE" at 45.466,67.31 h1.1 r270
  text "A.I. PCB" at 15.494,58.928 h1.4 r90
  text "A.I. PCB" at 32.512,58.928 h1.4 r90
  text "A.I. PCB" at 49.403,58.928 h1.4 r90
  text "A.I. PCB" at 66.294,58.928 h1.4 r90
  text "A.I. PCB" at 83.693,58.928 h1.4 r90
  text "A.I. PCB" at 100.965,58.928 h1.4 r90
  text "DARK SENSITIVE" at 15.621,44.831 h1.1
  text "DARK SENSITIVE" at 32.639,44.831 h1.1
  text "DARK SENSITIVE" at 49.53,44.831 h1.1
  text "DARK SENSITIVE" at 66.421,44.831 h1.1
  text "DARK SENSITIVE" at 83.82,44.831 h1.1
  text "DARK SENSITIVE" at 101.092,44.831 h1.1
  text "A.I. PCB" at 15.494,36.703 h1.4 r90
  text "A.I. PCB" at 32.512,36.703 h1.4 r90
  text "A.I. PCB" at 49.403,36.703 h1.4 r90
  text "A.I. PCB" at 66.294,36.703 h1.4 r90
  text "A.I. PCB" at 83.693,36.703 h1.4 r90
  text "A.I. PCB" at 100.965,36.703 h1.4 r90
  text "DARK SENSITIVE" at 15.621,22.606 h1.1
  text "DARK SENSITIVE" at 32.639,22.606 h1.1
  text "DARK SENSITIVE" at 49.53,22.606 h1.1
  text "DARK SENSITIVE" at 66.421,22.606 h1.1
  text "DARK SENSITIVE" at 83.82,22.606 h1.1
  text "DARK SENSITIVE" at 101.092,22.606 h1.1
  text "A.I. PCB" at 15.494,14.986 h1.4 r90
  text "A.I. PCB" at 32.512,14.986 h1.4 r90
  text "A.I. PCB" at 49.403,14.986 h1.4 r90
  text "A.I. PCB" at 66.294,14.986 h1.4 r90
  text "A.I. PCB" at 83.693,14.986 h1.4 r90
  text "A.I. PCB" at 100.965,14.986 h1.4 r90
  text "DARK SENSITIVE" at 15.621,0.889 h1.1
  text "DARK SENSITIVE" at 32.639,0.889 h1.1
  text "DARK SENSITIVE" at 49.53,0.889 h1.1
  text "DARK SENSITIVE" at 66.421,0.889 h1.1
  text "DARK SENSITIVE" at 83.82,0.889 h1.1
  text "DARK SENSITIVE" at 101.092,0.889 h1.1
Mechanical 1:
  lines w0.254: 102.108,-0.254 102.108,65.913